# EAGLE board Versorgungseinheit_v2 (EAGLE 6.5.0)
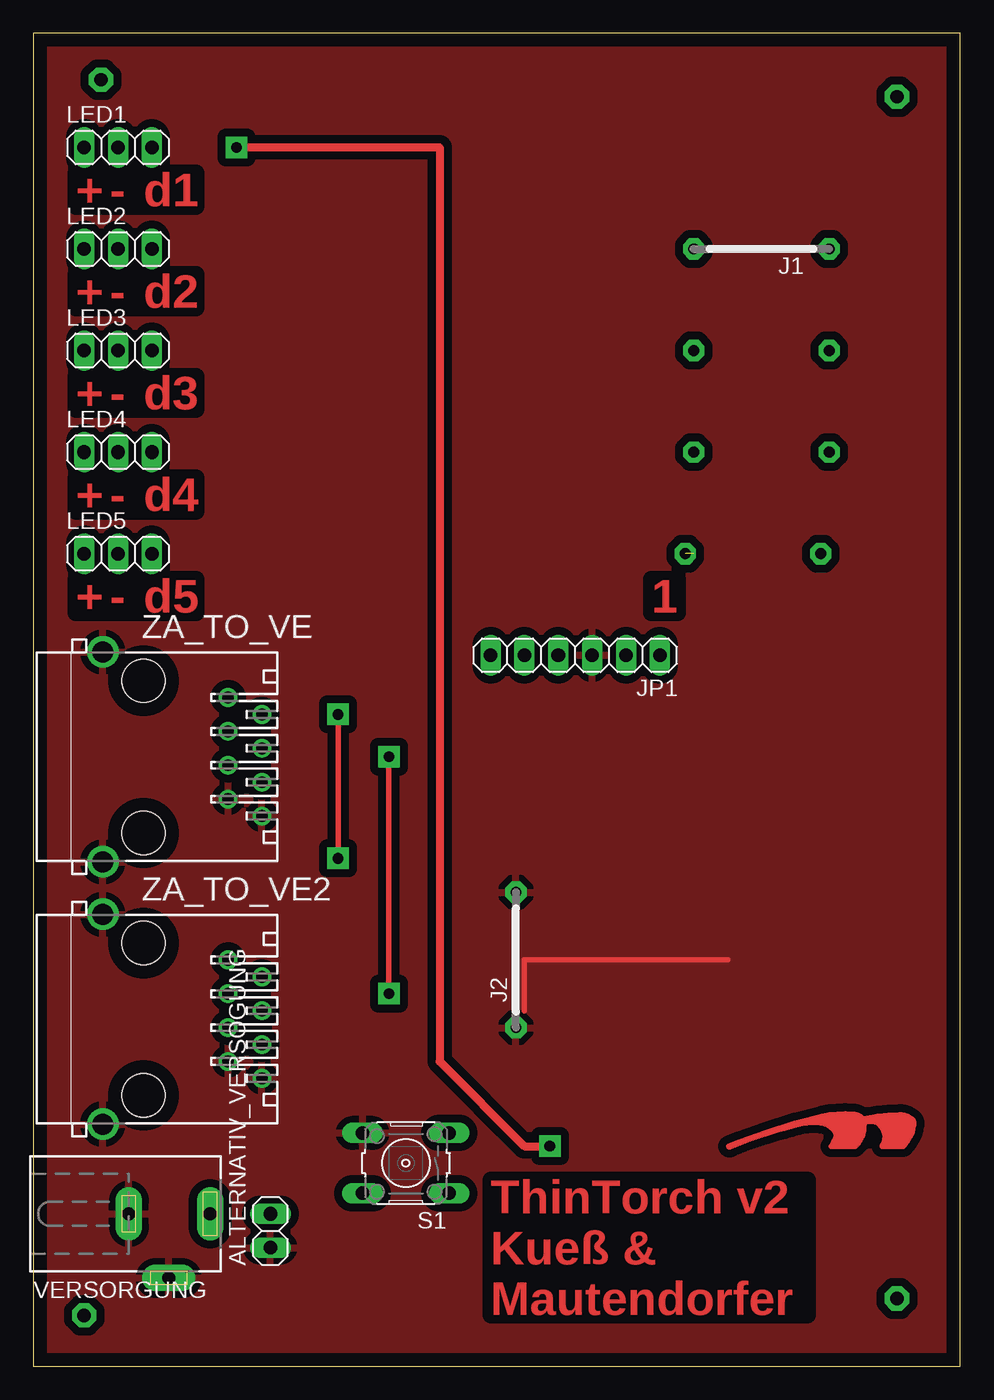
[diagram p0: board, top side]
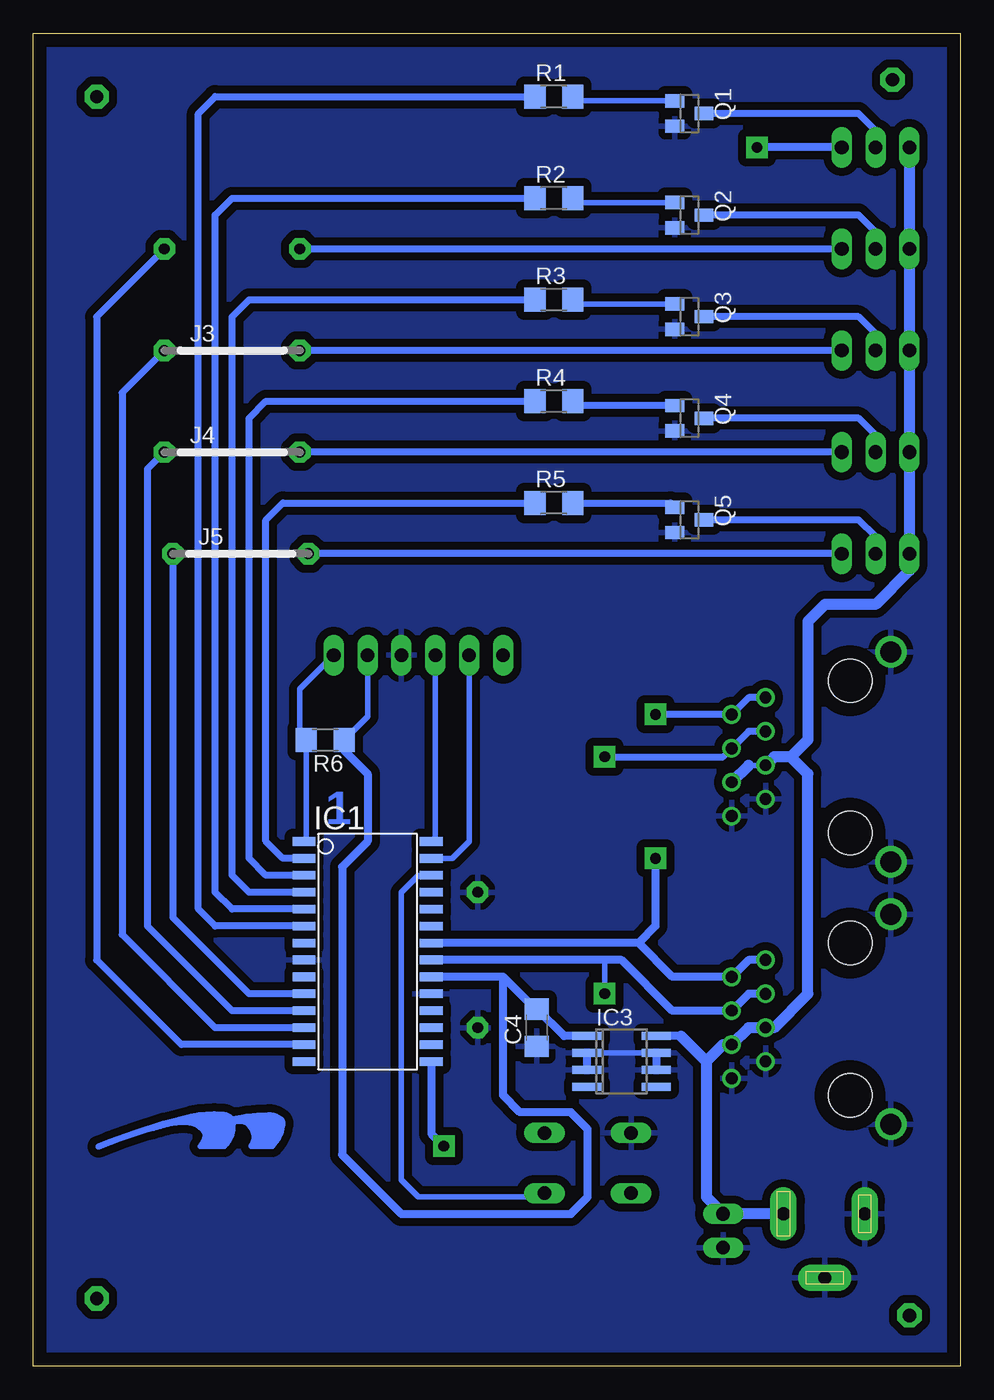
[diagram p1: board, bottom side, seen from below]

Size 69.52 x 100 mm. Coordinates in mm from the lower left corner, seen from the top.
Outline: 0,0 69.52,0 69.52,100 0,100 0,0
Copper layers (1*16): Top 0.035mm / dielectric 1.6mm / Bottom 0.035mm
Design rules "default *": minimum track width 16mil, minimum drill 31mil, track to track 24mil, track to pad 16mil, pad to pad 24mil, via to via 24mil, smd to smd 16mil, copper to edge 40mil, drill to drill 20mil, minimum pad ring 10mil, minimum via ring 16mil, stop-mask expansion 4mil, vias tented up to drill 0mil, thermal gap 20mil

## Footprints (pad centres in the part's own frame; a part is rotated, then mirrored left to right if it is on the bottom)
1X02 = drill 1.016 long: 1 -1.27,0; 2 1.27,0
C1206 = smd 1.6 x 1.8: 1 -1.4,0; 2 1.4,0
SO28W = smd 0.65 x 1.7: 1 -7.62,-4.78; 2 -6.35,-4.78; 3 -5.08,-4.78; 4 -3.81,-4.78; 5 -2.54,-4.78; 6 -1.27,-4.78; 7 0,-4.78; 8 1.27,-4.78; 9 2.54,-4.78; 10 3.81,-4.78; 11 5.08,-4.78; 12 6.35,-4.78; 13 7.62,-4.78; 14 8.89,-4.78; 15 8.89,4.78; 16 7.62,4.78; 17 6.35,4.78; 18 5.08,4.78; 19 3.81,4.78; 20 2.54,4.78; 21 1.27,4.78; 22 0,4.78; 23 -1.27,4.78; 24 -2.54,4.78; 25 -3.81,4.78; 26 -5.08,4.78; 27 -6.35,4.78; 28 -7.62,4.78
SO08 = smd 0.6 x 2.2: 1 -1.905,-2.6; 2 -0.635,-2.6; 3 0.635,-2.6; 4 1.905,-2.6; 5 1.905,2.6; 6 0.635,2.6; 7 -0.635,2.6; 8 -1.905,2.6
10 = drill 0.813 pad 1.6 octagon: 1 -5.08,0; 2 5.08,0
1X06 = drill 1.016 long: 1 -6.35,0; 2 -3.81,0; 3 -1.27,0; 4 1.27,0; 5 3.81,0; 6 6.35,0
1X03 = drill 1.016 long: 1 -2.54,0; 2 0,0; 3 2.54,0
SOT23 = smd 1 x 1.4: 1 -0.95,-1.1; 2 0.95,-1.1; 3 0,1.1
R1206 = smd 1.6 x 1.803: 1 -1.422,0; 2 1.422,0
B3F-10XX = drill 1.016 long: 1 -3.251,2.261; 2 3.251,2.261; 3 -3.251,-2.261; 4 3.251,-2.261
DCJ0303 = drill 1 pad 2 long: 1 0,3.1; 2 4.8,0; 3 0,-3
555153-1 = drill 0.889: 1 -4.445,6.35; 2 -3.175,8.89; 3 -1.905,6.35; 4 -0.635,8.89; 5 0.635,6.35; 6 1.905,8.89; 7 3.175,6.35; 8 4.445,8.89 | drill 1.575 pad 2.184: G1 -7.874,-3.048; G2 7.874,-3.048 | hole 3.251: -5.715,0; 5.715,0

## Placement (x,y rotation side)
ALTERNATIV_VERSOGUNG  12V  [1X02]  17.78,10.16 90 top
C4  100n  [C1206]  31.75,25.4 90 bottom
IC1  PIC18F2455_28W  [SO28W]  44.45,31.75 270 bottom
IC3  78L05SMD  [SO08]  25.4,22.86 270 bottom
J1  J10MM  [10]  54.61,83.82 180 top
J2  J10MM  [10]  36.2,30.48 90 top
J3  J10MM  [10]  54.61,76.2 0 bottom
J4  J10MM  [10]  54.61,68.58 0 bottom
J5  J10MM  [10]  53.98,60.96 0 bottom
JP1  PicKit  [1X06]  40.64,53.34 180 top
LED1  [1X03]  6.35,91.44 0 top
LED2  [1X03]  6.35,83.82 0 top
LED3  [1X03]  6.35,76.2 0 top
LED4  [1X03]  6.35,68.58 0 top
LED5  [1X03]  6.35,60.96 0 top
Q1  BC847  [SOT23]  20.32,93.98 270 bottom
Q2  BC847  [SOT23]  20.32,86.36 270 bottom
Q3  BC847  [SOT23]  20.32,78.74 270 bottom
Q4  BC847  [SOT23]  20.32,71.12 270 bottom
Q5  BC847  [SOT23]  20.32,63.5 270 bottom
R1  470  [R1206]  30.48,95.25 0 bottom
R2  470  [R1206]  30.48,87.63 0 bottom
R3  470  [R1206]  30.48,80.01 0 bottom
R4  470  [R1206]  30.48,72.39 0 bottom
R5  470  [R1206]  30.48,64.77 0 bottom
R6  10k  [R1206]  47.62,46.99 180 bottom
S1  [B3F-10XX]  27.94,15.24 180 top
U$1  HTL_LOGOBOTTOP_15MM  [LOGO_15]  58.42,16.51 0 top
VERSORGUNG  12V  [DCJ0303]  10.16,11.43 270 top
ZA_TO_VE  [555153-1]  8.26,45.72 270 top
ZA_TO_VE2  [555153-1]  8.26,26.04 270 top

## Library data of the parts
ALTERNATIV_VERSOGUNG JP1 LED1-LED5 = pinhead
C4 R1-R6 = resistor
IC1 = microchip; MF: MICROCHIP; MPN: PIC18F2455-I/SO; OC_FARNELL: 1579598; OC_NEWARK: 64J3768
IC3 = linear
J1-J5 = jumper
Q1-Q5 = transistor
S1 = switch-omron; MPN: B3F-1000; OC_FARNELL: 176432; OC_NEWARK: 36M3542
U$1 = HTL-Logo
VERSORGUNG = con-jack; OC_FARNELL: unknown; OC_NEWARK: unknown
ZA_TO_VE ZA_TO_VE2 = con-amp

## Nets
N$1: IC1.2 R5.1
N$2: IC1.3 R4.1
N$3: IC1.6 R1.1
N$4: IC1.4 R3.1
N$5: IC1.26 S1.1
N$7: IC1.5 R2.1
N$8: J5.2 LED5.3
N$9: Q1.1 R1.2
N$10: Q2.1 R2.2
N$11: Q3.1 R3.2
N$12: Q4.1 R4.2
N$13: Q5.1 R5.2
N$14: LED1.2 Q1.3
N$15: LED2.2 Q2.3
N$16: LED3.2 Q3.3
N$17: LED4.2 Q4.3
N$18: LED5.2 Q5.3
N$19: J4.2 LED4.3
N$20: C4.2 IC1.20 IC3.1 JP1.2 R6.1
N$21: J3.2 LED3.3
N$22: IC1.13 J1.1
N$23: IC1.15 LED1.3
N$27: IC1.28 JP1.4
N$29: IC1.27 JP1.5
N$30: IC1.1 JP1.1 R6.2
N$31: J1.2 LED2.3
N$32: IC1.12 J3.1
N$33: IC1.11 J4.1
N$34: IC1.10 J5.1
SCL: IC1.22 ZA_TO_VE2.1 ZA_TO_VE2.2 ZA_TO_VE.1 ZA_TO_VE.2
SDA: IC1.21 ZA_TO_VE2.3 ZA_TO_VE2.4 ZA_TO_VE.3 ZA_TO_VE.4
VDD: ALTERNATIV_VERSOGUNG.2 IC3.8 LED1.1 LED2.1 LED3.1 LED4.1 LED5.1 VERSORGUNG.1 ZA_TO_VE2.5 ZA_TO_VE2.6 ZA_TO_VE.5 ZA_TO_VE.6
VSS: ALTERNATIV_VERSOGUNG.1 C4.1 IC1.8 IC1.19 IC3.2 IC3.3 IC3.6 IC3.7 J2.1 J2.2 JP1.3 Q1.2 Q2.2 Q3.2 Q4.2 Q5.2 S1.4 VERSORGUNG.2 VERSORGUNG.3 ZA_TO_VE2.7 ZA_TO_VE2.8 ZA_TO_VE2.G1 ZA_TO_VE2.G2 ZA_TO_VE.7 ZA_TO_VE.8 ZA_TO_VE.G1 ZA_TO_VE.G2

## Tracks (layer width: path | path; a pad name or v marks a point on that pad's centre or on a via)
N$1
  Bottom 0.508: IC1.2 50.8,38.1 52.07,39.37 52.07,63.5 50.8,64.77 R5.1
N$2
  Bottom 0.508: IC1.3 52.07,36.83 53.34,38.1 53.34,71.12 52.07,72.39 R4.1
N$3
  Bottom 0.508: IC1.6 55.88,33.02 57.15,34.29 57.15,93.98 55.88,95.25 R1.1
N$4
  Bottom 0.508: IC1.4 53.34,35.56 54.61,36.83 54.61,78.74 53.34,80.01 R3.1
N$5
  Bottom 0.406: IC1.26 40.64,36.83 41.91,35.56 41.91,13.97 40.64,12.7 31.47,12.7 S1.1
N$6  (via drill 1)
  other vias: 5.08,96.52
N$7
  Bottom 0.508: IC1.5 54.61,34.29 55.88,35.56 55.88,86.36 54.61,87.63 R2.1
N$8  (1 unrouted)
  Bottom 0.508: LED5.3 49.53,60.96
N$9
  Bottom 0.406: Q1.1 28.74,94.93 R1.2
N$10
  Bottom 0.406: Q2.1 28.74,87.31 R2.2
N$11
  Bottom 0.406: Q3.1 28.74,79.69 R3.2
N$12
  Bottom 0.406: 28.74,72.07 R4.2
  Bottom 0.508: Q4.1 28.74,72.07
N$13
  Bottom 0.406: 21.74,64.77 Q5.1
  Bottom 0.508: R5.2 21.74,64.77
N$14
  Bottom 0.406: LED1.2 6.35,92.71
  Bottom 0.508: 6.35,92.71 7.62,93.98 Q1.3
N$15
  Bottom 0.406: LED2.2 6.35,85.09
  Bottom 0.508: 6.35,85.09 7.62,86.36 Q2.3
N$16
  Bottom 0.406: LED3.2 6.35,77.47
  Bottom 0.508: 6.35,77.47 7.62,78.74 Q3.3
N$17
  Bottom 0.406: LED4.2 6.35,69.85
  Bottom 0.508: 6.35,69.85 7.62,71.12 Q4.3
N$18
  Bottom 0.406: LED5.2 6.35,62.23
  Bottom 0.508: 6.35,62.23 7.62,63.5 Q5.3
N$19
  Bottom 0.508: LED4.3 J4.2
N$20
  Bottom 0.406: 45.72,47.47 R6.1 44.45,48.74 JP1.2
  Bottom 0.61: IC3.1 29.71,24.77 C4.2 31.88,26.8 34.29,29.21 | 34.29,29.21 IC1.20 | R6.1 46.2,46.2 44.45,44.45 44.45,39.37 46.35,37.47 46.35,15.88 41.91,11.43 29.21,11.43 27.94,12.7 27.94,17.78 29.21,19.05 33.02,19.05 34.29,20.32 34.29,29.21
N$21
  Bottom 0.508: LED3.3 J3.2
N$22
  Bottom 0.508: IC1.13 58.42,24.13 64.77,30.48 64.77,78.74 J1.1
N$23  (via drill 0.8)
  Top 0.61: v15.24,91.44 30.48,91.44 30.48,22.86 36.83,16.51 v38.73,16.51
  Bottom 0.61: LED1.3 v15.24,91.44 | IC1.15 39.67,17.45 v38.73,16.51
N$24  (via drill 1)
  other vias: 64.77,95.25
N$25  (via drill 1)
  other vias: 64.77,5.08
N$26  (via drill 1)
  other vias: 3.81,3.81
N$27
  Bottom 0.406: JP1.4 39.37,39.67 IC1.28
N$29
  Bottom 0.406: IC1.27 38.1,38.1 36.83,39.37 JP1.5
N$30
  Bottom 0.406: IC1.1 49.05,39.55 R6.2 49.53,47.47 49.53,50.8 JP1.1
N$31
  Bottom 0.508: LED2.3 J1.2
N$32
  Bottom 0.508: IC1.12 55.88,25.4 62.87,32.38 62.87,73.03 J3.1
N$33
  Bottom 0.508: IC1.11 54.61,26.67 60.96,33.02 60.96,67.31 J4.1
N$34
  Bottom 0.508: IC1.10 53.34,27.94 59.05,33.66 J5.1
SCL  (via drill 0.8)
  Top 0.406: v22.86,48.9 v22.86,38.1
  Bottom 0.508: ZA_TO_VE.1 15.88,50.16 ZA_TO_VE.2 v22.86,48.9
  Bottom 0.61: ZA_TO_VE2.1 15.88,30.48 ZA_TO_VE2.2 21.59,29.21 24.13,31.75 | 24.13,31.75 IC1.22 | v22.86,38.1 22.86,33.02 24.13,31.75
SDA  (via drill 0.8)
  Top 0.406: v26.67,45.72 v26.67,27.94
  Bottom 0.406: 17.78,45.72 ZA_TO_VE.4 | v26.67,27.94 26.67,30.48
  Bottom 0.508: ZA_TO_VE.3 15.88,47.62 ZA_TO_VE.4 | v26.67,45.72 17.78,45.72
  Bottom 0.61: ZA_TO_VE2.3 15.88,27.94 ZA_TO_VE2.4 21.59,26.67 25.4,30.48 26.67,30.48 IC1.21
VDD
  Bottom 0.406: ZA_TO_VE.5 15.88,45.09 | ZA_TO_VE2.6 17.78,24.13
  Bottom 0.61: ZA_TO_VE2.5 13.97,25.4 | 20.95,24.77 IC3.8
  Bottom 0.813: VERSORGUNG.1 ALTERNATIV_VERSOGUNG.2 19.05,12.7 19.05,22.86 | 15.88,45.09 ZA_TO_VE.6 | ZA_TO_VE2.5 15.88,25.4 ZA_TO_VE2.6 | 17.78,24.13 19.05,22.86 | 20.95,24.77 19.05,22.86 | LED1.1 LED2.1 LED3.1 LED4.1 LED5.1 3.81,59.69 6.35,57.15 10.16,57.15 11.43,55.88 11.43,46.99 12.7,45.72 | 12.7,45.72 13.97,45.72 ZA_TO_VE.5 | 13.97,25.4 11.43,27.94 11.43,44.45 12.7,45.72
VSS
  Top 0.406: 52.07,30.48 36.83,30.48 36.83,26.67
  Bottom 0.406: IC3.7 27.3,23.5
  Bottom 0.61: IC3.7 IC3.6 | 27.3,23.5 IC3.2 IC3.3
  pour Bottom: 0,100.33 68.58,100.33 68.58,0 0,0
  pour Top: 0,0 0,100.33 69.85,100.33 69.85,0
  pour Top: 0,0 69.85,0 69.85,100.33 0,100.33
  pour Bottom: 0,0 0,100.33 69.85,100.33 69.85,0

## Text on the board
Top: + | - | d1 | + | - | d2 | + | - | d3 | + | - | d4 | + | - | d5 | 1 | ThinTorch v2 / Kueß & / Mautendorfer
Bottom: 1